# EAGLE board BlinkyTile_panel2 (EAGLE 7.1.0)
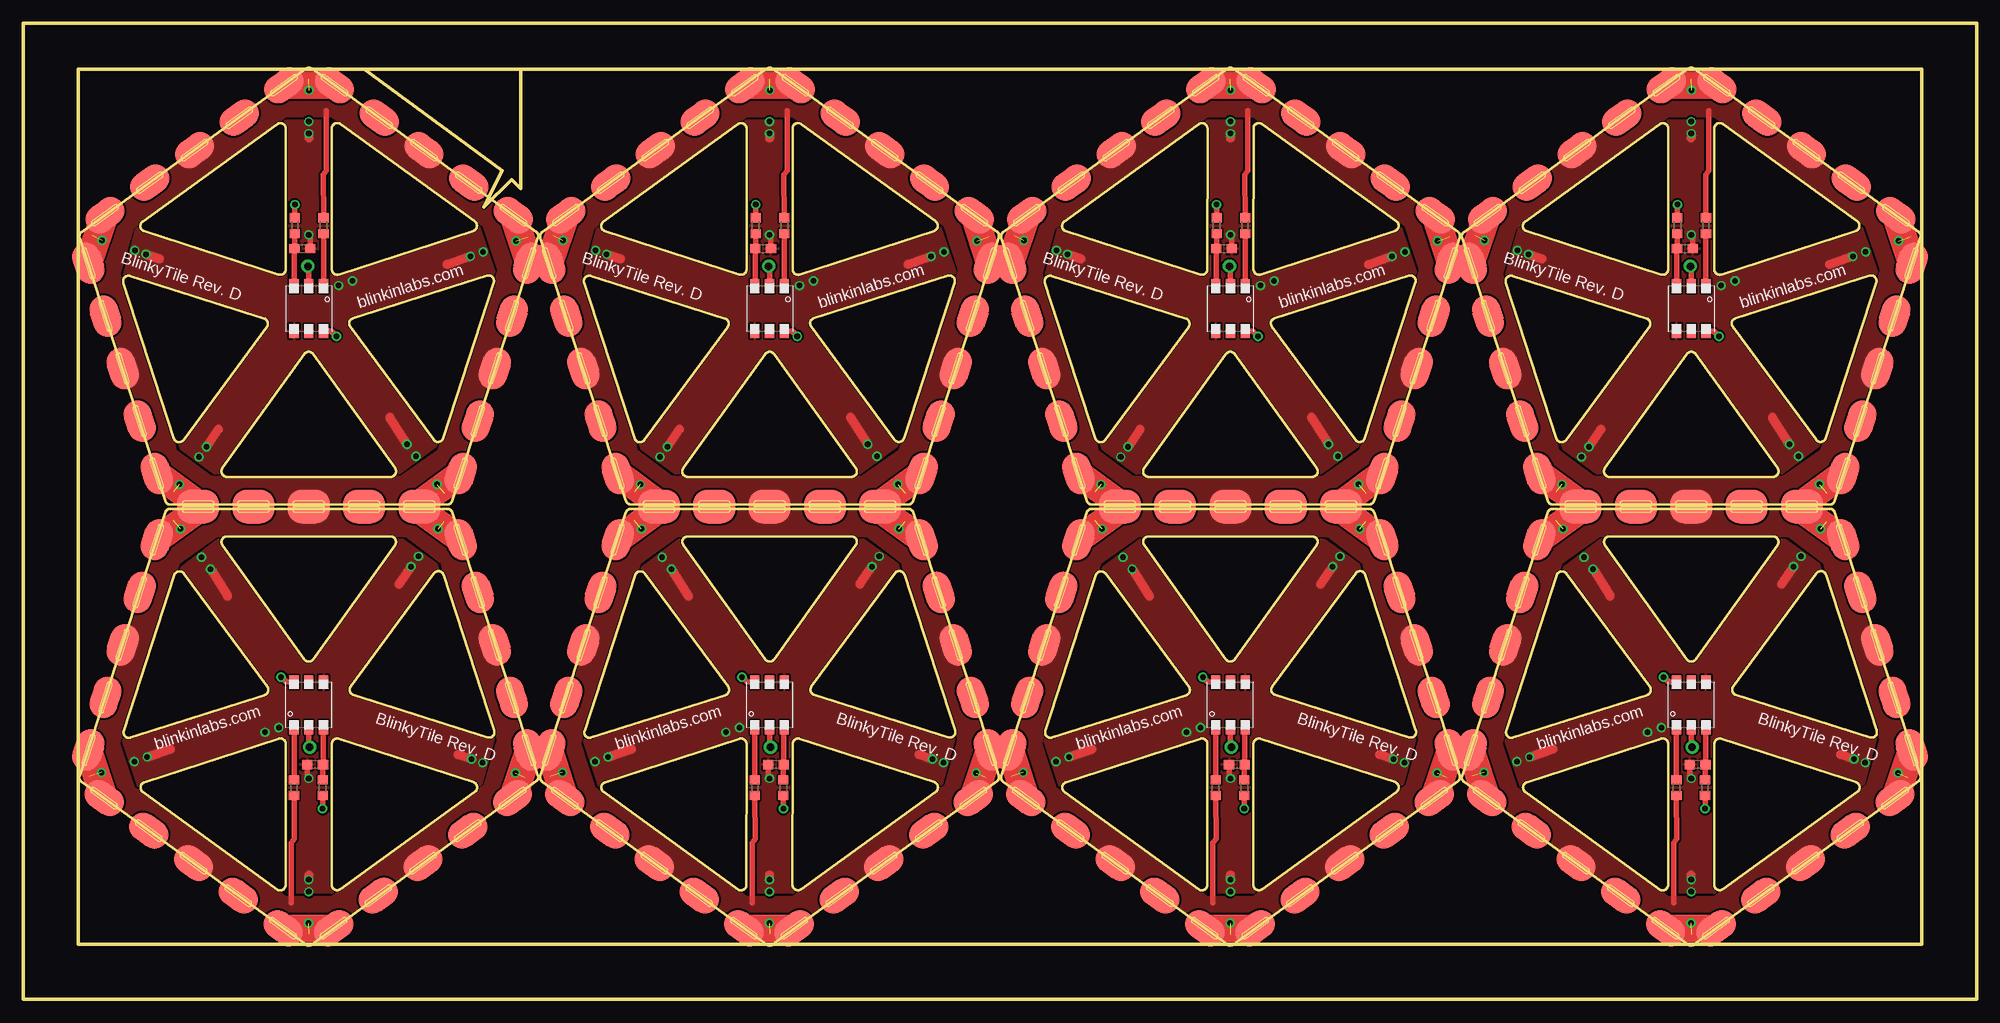
[diagram p0: board, top side]
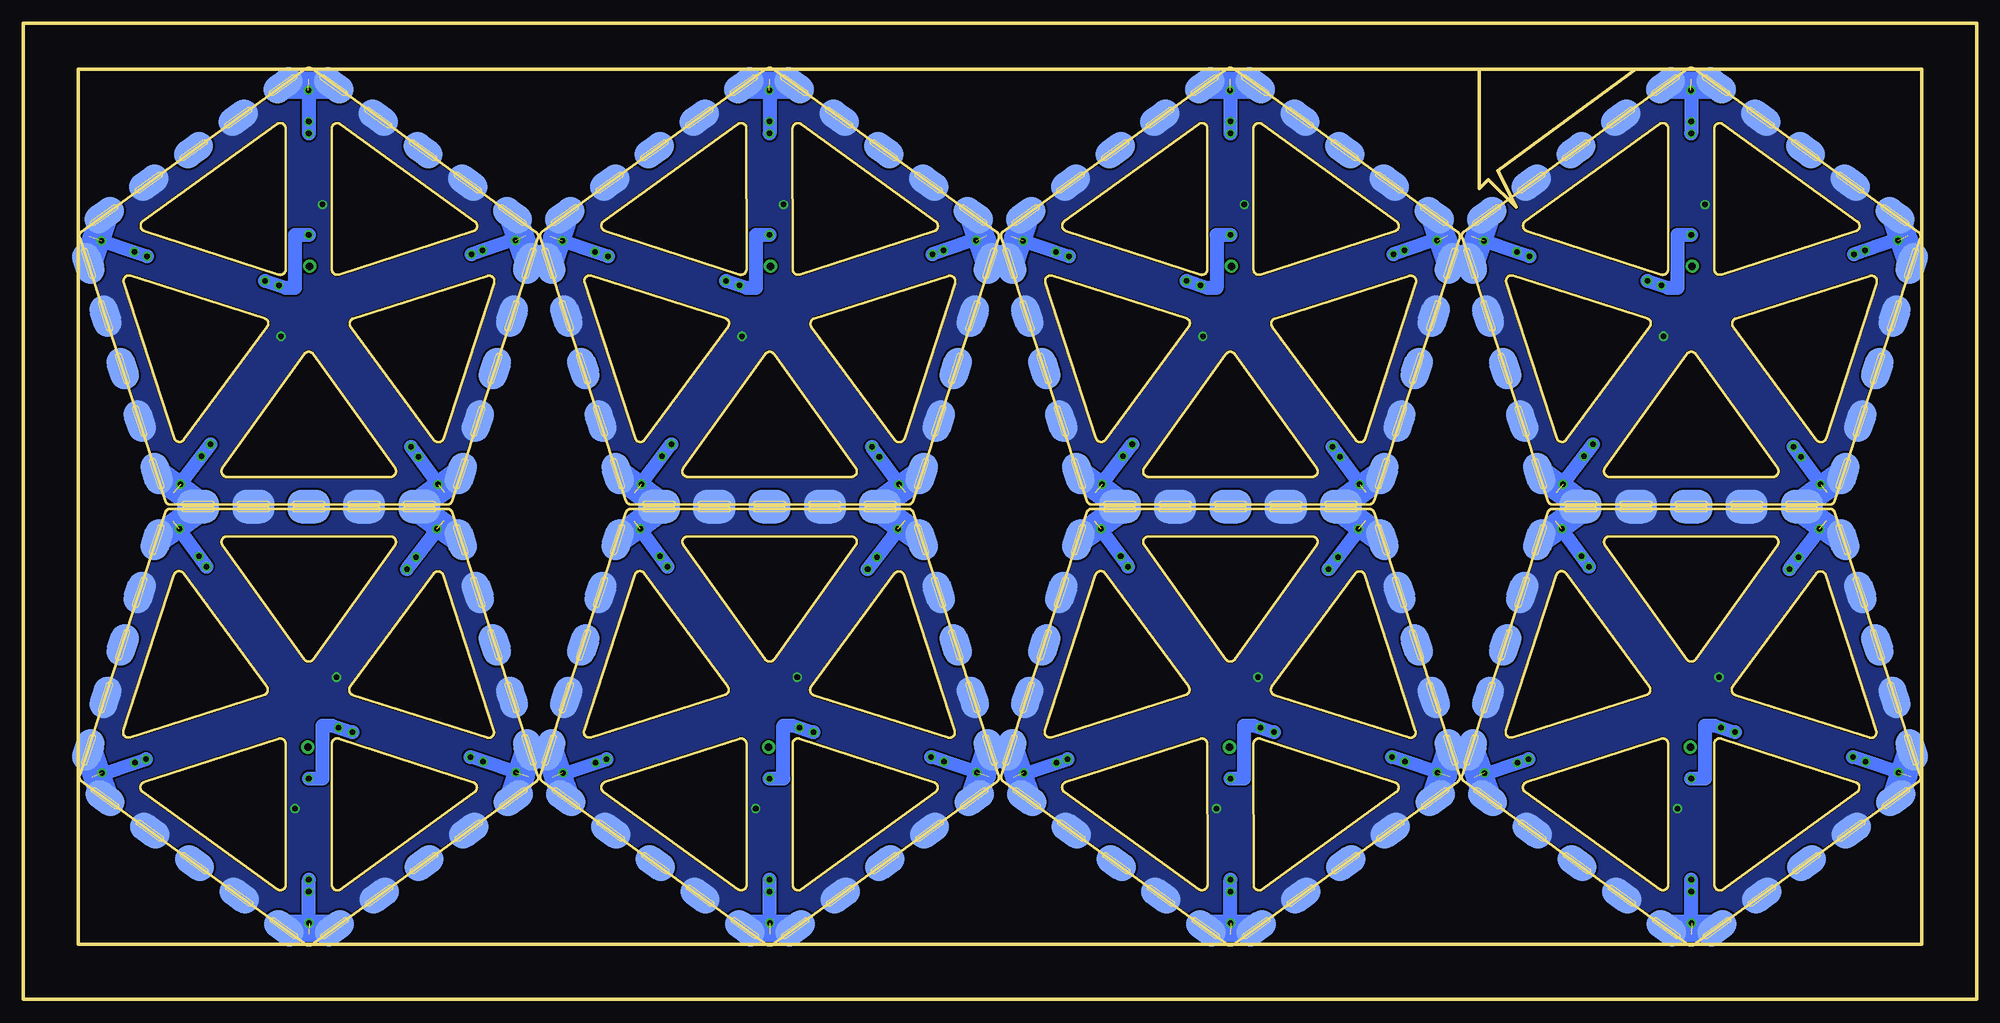
[diagram p1: board, bottom side, seen from below]

Size 212 x 106 mm. Coordinates in mm from the lower left corner, seen from the top.
Outline: 37,101 6,101 6,6 206,6 206,101 54,101
Outline: 37,101 54,101
Outline: 54,101 54,88 53,89 50,86 52,90 37,101
Outline: 6.14,82.66 15.41,54.14 arc72 15.99,53.73 46.01,53.73 arc72 46.59,54.14 55.86,82.7 arc72 55.65,83.38 31.35,101.02 arc72 30.65,101.02 6.35,83.33 arc72 6.14,82.66
Outline: 21.64,57.68 30.51,70.07 arc-109 31.49,70.07 40.36,57.68 arc-126 39.87,56.73 22.13,56.73 arc-126 21.64,57.68
Outline: 44.54,60.77 35.5,73.03 arc-109 35.8,73.96 50.33,78.57 arc-126 51.08,77.81 45.6,60.94 arc-126 44.54,60.77
Outline: 11.63,78.54 26.15,73.94 arc-109 26.45,73.01 17.41,60.74 arc-126 16.36,60.91 10.88,77.79 arc-126 11.63,78.54
Outline: 28.52,94.54 28.5,79.27 arc-108 27.71,78.69 13.14,83.4 arc-126 12.97,84.46 27.57,95.03 arc-126 28.52,94.54
Outline: 48.84,83.42 34.28,78.69 arc-108 33.5,79.26 33.51,94.55 arc-126 34.46,95.04 49.01,84.48 arc-126 48.84,83.42
Outline: 55.86,24.34 46.59,52.86 arc72 46.01,53.27 15.99,53.27 arc72 15.41,52.86 6.14,24.3 arc72 6.35,23.62 30.65,5.98 arc72 31.35,5.98 55.65,23.67 arc72 55.86,24.34
Outline: 40.36,49.32 31.49,36.93 arc-109 30.51,36.93 21.64,49.32 arc-126 22.13,50.27 39.87,50.27 arc-126 40.36,49.32
Outline: 17.46,46.23 26.5,33.97 arc-109 26.2,33.04 11.67,28.43 arc-126 10.92,29.19 16.4,46.06 arc-126 17.46,46.23
Outline: 50.37,28.46 35.85,33.06 arc-109 35.55,33.99 44.59,46.26 arc-126 45.64,46.09 51.12,29.21 arc-126 50.37,28.46
Outline: 33.48,12.46 33.5,27.73 arc-108 34.28,28.3 48.86,23.6 arc-126 49.03,22.54 34.43,11.97 arc-126 33.48,12.46
Outline: 13.16,23.58 27.72,28.31 arc-108 28.5,27.74 28.49,12.45 arc-126 27.54,11.96 12.99,22.52 arc-126 13.16,23.58
Outline: 0,106 212,106 212,0 0,0 0,106
Outline: 56.14,82.66 65.41,54.14 arc72 65.99,53.73 96.01,53.73 arc72 96.58,54.14 105.86,82.7 arc72 105.65,83.38 81.35,101.02 arc72 80.65,101.02 56.35,83.33 arc72 56.14,82.66
Outline: 71.64,57.68 80.51,70.07 arc-109 81.49,70.07 90.36,57.68 arc-126 89.87,56.73 72.13,56.73 arc-126 71.64,57.68
Outline: 94.54,60.77 85.5,73.03 arc-109 85.8,73.96 100.33,78.57 arc-126 101.08,77.81 95.6,60.94 arc-126 94.54,60.77
Outline: 61.63,78.54 76.15,73.94 arc-109 76.45,73.01 67.41,60.74 arc-126 66.36,60.91 60.88,77.79 arc-126 61.63,78.54
Outline: 78.52,94.54 78.5,79.27 arc-108 77.72,78.69 63.14,83.4 arc-126 62.97,84.46 77.57,95.03 arc-126 78.52,94.54
Outline: 98.84,83.42 84.28,78.69 arc-108 83.5,79.26 83.51,94.55 arc-126 84.46,95.04 99.01,84.48 arc-126 98.84,83.42
Outline: 105.86,24.34 96.58,52.86 arc72 96.01,53.27 65.99,53.27 arc72 65.41,52.86 56.14,24.3 arc72 56.35,23.62 80.65,5.98 arc72 81.35,5.98 105.65,23.67 arc72 105.86,24.34
Outline: 90.36,49.32 81.49,36.93 arc-109 80.51,36.93 71.64,49.32 arc-126 72.13,50.27 89.87,50.27 arc-126 90.36,49.32
Outline: 67.46,46.23 76.5,33.97 arc-109 76.2,33.04 61.67,28.43 arc-126 60.92,29.19 66.4,46.06 arc-126 67.46,46.23
Outline: 100.37,28.46 85.85,33.06 arc-109 85.55,33.99 94.59,46.26 arc-126 95.64,46.09 101.12,29.21 arc-126 100.37,28.46
Outline: 83.48,12.46 83.5,27.73 arc-108 84.28,28.3 98.86,23.6 arc-126 99.03,22.54 84.43,11.97 arc-126 83.48,12.46
Outline: 63.16,23.58 77.72,28.31 arc-108 78.5,27.74 78.49,12.45 arc-126 77.54,11.96 62.99,22.52 arc-126 63.16,23.58
Outline: 106.14,82.66 115.42,54.14 arc72 115.99,53.73 146.01,53.73 arc72 146.58,54.14 155.87,82.7 arc72 155.65,83.38 131.35,101.02 arc72 130.65,101.02 106.35,83.33 arc72 106.14,82.66
Outline: 121.64,57.68 130.51,70.07 arc-109 131.49,70.07 140.36,57.68 arc-126 139.87,56.73 122.13,56.73 arc-126 121.64,57.68
Outline: 144.54,60.77 135.5,73.03 arc-109 135.8,73.96 150.33,78.57 arc-126 151.08,77.81 145.6,60.94 arc-126 144.54,60.77
Outline: 111.63,78.54 126.15,73.94 arc-109 126.45,73.01 117.41,60.74 arc-126 116.36,60.91 110.88,77.79 arc-126 111.63,78.54
Outline: 128.52,94.54 128.5,79.27 arc-108 127.72,78.69 113.14,83.4 arc-126 112.97,84.46 127.57,95.03 arc-126 128.52,94.54
Outline: 148.84,83.42 134.28,78.69 arc-108 133.5,79.26 133.51,94.55 arc-126 134.46,95.04 149.01,84.48 arc-126 148.84,83.42
Outline: 155.87,24.34 146.58,52.86 arc72 146.01,53.27 115.99,53.27 arc72 115.42,52.86 106.14,24.3 arc72 106.35,23.62 130.65,5.98 arc72 131.35,5.98 155.65,23.67 arc72 155.87,24.34
Outline: 140.36,49.32 131.49,36.93 arc-109 130.51,36.93 121.64,49.32 arc-126 122.13,50.27 139.87,50.27 arc-126 140.36,49.32
Outline: 117.46,46.23 126.5,33.97 arc-109 126.2,33.04 111.67,28.43 arc-126 110.92,29.19 116.4,46.06 arc-126 117.46,46.23
Outline: 150.37,28.46 135.85,33.06 arc-109 135.55,33.99 144.59,46.26 arc-126 145.64,46.09 151.12,29.21 arc-126 150.37,28.46
Outline: 133.48,12.46 133.5,27.73 arc-108 134.28,28.3 148.86,23.6 arc-126 149.03,22.54 134.43,11.97 arc-126 133.48,12.46
Outline: 113.16,23.58 127.72,28.31 arc-108 128.5,27.74 128.49,12.45 arc-126 127.54,11.96 112.99,22.52 arc-126 113.16,23.58
Outline: 156.13,82.66 165.41,54.14 arc72 165.99,53.73 196.01,53.73 arc72 196.59,54.14 205.87,82.7 arc72 205.65,83.38 181.35,101.02 arc72 180.65,101.02 156.35,83.33 arc72 156.13,82.66
Outline: 171.64,57.68 180.51,70.07 arc-109 181.49,70.07 190.36,57.68 arc-126 189.87,56.73 172.13,56.73 arc-126 171.64,57.68
Outline: 194.54,60.77 185.5,73.03 arc-109 185.8,73.96 200.33,78.57 arc-126 201.08,77.81 195.6,60.94 arc-126 194.54,60.77
Outline: 161.63,78.54 176.15,73.94 arc-109 176.46,73.01 167.41,60.74 arc-126 166.36,60.91 160.88,77.79 arc-126 161.63,78.54
Outline: 178.52,94.54 178.5,79.27 arc-108 177.72,78.69 163.14,83.4 arc-126 162.97,84.46 177.57,95.03 arc-126 178.52,94.54
Outline: 198.84,83.42 184.28,78.69 arc-108 183.5,79.26 183.51,94.55 arc-126 184.46,95.04 199.01,84.48 arc-126 198.84,83.42
Outline: 205.87,24.34 196.59,52.86 arc72 196.01,53.27 165.99,53.27 arc72 165.41,52.86 156.13,24.3 arc72 156.35,23.62 180.65,5.98 arc72 181.35,5.98 205.65,23.67 arc72 205.87,24.34
Outline: 190.36,49.32 181.49,36.93 arc-109 180.51,36.93 171.64,49.32 arc-126 172.13,50.27 189.87,50.27 arc-126 190.36,49.32
Outline: 167.46,46.23 176.5,33.97 arc-109 176.2,33.04 161.67,28.43 arc-126 160.92,29.19 166.4,46.06 arc-126 167.46,46.23
Outline: 200.37,28.46 185.85,33.06 arc-109 185.54,33.99 194.59,46.26 arc-126 195.64,46.09 201.12,29.21 arc-126 200.37,28.46
Outline: 183.48,12.46 183.5,27.73 arc-108 184.28,28.3 198.86,23.6 arc-126 199.03,22.54 184.43,11.97 arc-126 183.48,12.46
Outline: 163.16,23.58 177.72,28.31 arc-108 178.5,27.74 178.49,12.45 arc-126 177.54,11.96 162.99,22.52 arc-126 163.16,23.58
Copper layers (1*16): Top 0.035mm / dielectric 1.5mm / Bottom 0.035mm
Design rules "default *": minimum track width 10mil, minimum drill 0.6mm, track to track 8mil, track to pad 8mil, pad to pad 8mil, via to via 8mil, smd to smd 8mil, copper to edge 0.1mm, drill to drill 8mil, minimum pad ring 10mil, minimum via ring 8mil, stop-mask expansion 4mil, vias tented up to drill 0.6mm, thermal gap 10mil
tRestrict: area 29,78 to 33,81

## Footprints (pad centres in the part's own frame; a part is rotated, then mirrored left to right if it is on the bottom)
C0603 = smd 1.1 x 1: 1 -0.85,0; 2 0.85,0
R0603 = smd 1 x 1.1: 1 -0.85,0; 2 0.85,0
D_EDGE_SLOT = smd 4.572 x 3.048: P$1 -12,0; P$2 -6,0; P$3 0,0; P$4 6,0; P$5 12,0 | smd 4.572 x 3.048 bottom: P$6 -12,0; P$7 -6,0; P$8 0,0; P$9 6,0; P$10 12,0
WS2822S_LED = smd 1.5 x 1: 1 -2.45,1.6; 2 -2.45,0; 3 -2.45,-1.6; 4 2.45,-1.6; 5 2.45,0; 6 2.45,1.6

## Placement (x,y rotation side)
C1  .1uF  [C0603]  30.3,81.5 0 top
C2  .1uF  [C0603]  31.7,25.5 180 top
C3  .1uF  [C0603]  80.3,81.5 0 top
C4  .1uF  [C0603]  81.7,25.5 180 top
C5  .1uF  [C0603]  130.3,81.5 0 top
C6  .1uF  [C0603]  131.7,25.5 180 top
C7  .1uF  [C0603]  180.3,81.5 0 top
C8  .1uF  [C0603]  181.7,25.5 180 top
R1  75  [R0603]  29.5,84 270 top
R2  10k  [R0603]  32.6,84 90 top
R3  75  [R0603]  32.5,23 90 top
R4  10k  [R0603]  29.4,23 270 top
R5  75  [R0603]  79.5,84 270 top
R6  10k  [R0603]  82.6,84 90 top
R7  75  [R0603]  82.5,23 90 top
R8  10k  [R0603]  79.4,23 270 top
R9  75  [R0603]  129.5,84 270 top
R10  10k  [R0603]  132.6,84 90 top
R11  75  [R0603]  132.5,23 90 top
R12  10k  [R0603]  129.4,23 270 top
R13  75  [R0603]  179.5,84 270 top
R14  10k  [R0603]  182.6,84 90 top
R15  75  [R0603]  182.5,23 90 top
R16  10k  [R0603]  179.4,23 270 top
U$1  D_EDGESLOT  [D_EDGE_SLOT]  31,53.2 180 top
U$2  D_EDGESLOT  [D_EDGE_SLOT]  31,53.8 0 top
U$3  D_EDGESLOT  [D_EDGE_SLOT]  51.2,68.5 72 top
U$4  D_EDGESLOT  [D_EDGE_SLOT]  10.8,68.5 288 top
U$5  D_EDGESLOT  [D_EDGE_SLOT]  43.5,92.2 144 top
U$6  D_EDGESLOT  [D_EDGE_SLOT]  18.6,92.2 216 top
U$7  WS2822S_LED  [WS2822S_LED]  31,75 270 top
U$8  D_EDGESLOT  [D_EDGE_SLOT]  10.8,38.5 252 top
U$9  D_EDGESLOT  [D_EDGE_SLOT]  51.2,38.5 108 top
U$10  D_EDGESLOT  [D_EDGE_SLOT]  18.5,14.8 324 top
U$11  D_EDGESLOT  [D_EDGE_SLOT]  43.4,14.8 36 top
U$12  WS2822S_LED  [WS2822S_LED]  31,32 90 top
U$13  D_EDGESLOT  [D_EDGE_SLOT]  81,53.8 0 top
U$14  D_EDGESLOT  [D_EDGE_SLOT]  101.2,68.5 72 top
U$15  D_EDGESLOT  [D_EDGE_SLOT]  60.8,68.5 288 top
U$16  D_EDGESLOT  [D_EDGE_SLOT]  93.5,92.2 144 top
U$17  D_EDGESLOT  [D_EDGE_SLOT]  68.6,92.2 216 top
U$18  WS2822S_LED  [WS2822S_LED]  81,75 270 top
U$19  D_EDGESLOT  [D_EDGE_SLOT]  81,53.2 180 top
U$20  D_EDGESLOT  [D_EDGE_SLOT]  60.8,38.5 252 top
U$21  D_EDGESLOT  [D_EDGE_SLOT]  101.2,38.5 108 top
U$22  D_EDGESLOT  [D_EDGE_SLOT]  68.5,14.8 324 top
U$23  D_EDGESLOT  [D_EDGE_SLOT]  93.4,14.8 36 top
U$24  WS2822S_LED  [WS2822S_LED]  81,32 90 top
U$25  D_EDGESLOT  [D_EDGE_SLOT]  131,53.8 0 top
U$26  D_EDGESLOT  [D_EDGE_SLOT]  151.2,68.5 72 top
U$27  D_EDGESLOT  [D_EDGE_SLOT]  110.8,68.5 288 top
U$28  D_EDGESLOT  [D_EDGE_SLOT]  143.5,92.2 144 top
U$29  D_EDGESLOT  [D_EDGE_SLOT]  118.6,92.2 216 top
U$30  WS2822S_LED  [WS2822S_LED]  131,75 270 top
U$31  D_EDGESLOT  [D_EDGE_SLOT]  131,53.2 180 top
U$32  D_EDGESLOT  [D_EDGE_SLOT]  110.8,38.5 252 top
U$33  D_EDGESLOT  [D_EDGE_SLOT]  151.2,38.5 108 top
U$34  D_EDGESLOT  [D_EDGE_SLOT]  118.5,14.8 324 top
U$35  D_EDGESLOT  [D_EDGE_SLOT]  143.4,14.8 36 top
U$36  WS2822S_LED  [WS2822S_LED]  131,32 90 top
U$37  D_EDGESLOT  [D_EDGE_SLOT]  181,53.8 0 top
U$38  D_EDGESLOT  [D_EDGE_SLOT]  201.2,68.5 72 top
U$39  D_EDGESLOT  [D_EDGE_SLOT]  160.8,68.5 288 top
U$40  D_EDGESLOT  [D_EDGE_SLOT]  193.5,92.2 144 top
U$41  D_EDGESLOT  [D_EDGE_SLOT]  168.6,92.2 216 top
U$42  WS2822S_LED  [WS2822S_LED]  181,75 270 top
U$43  D_EDGESLOT  [D_EDGE_SLOT]  181,53.2 180 top
U$44  D_EDGESLOT  [D_EDGE_SLOT]  160.8,38.5 252 top
U$45  D_EDGESLOT  [D_EDGE_SLOT]  201.2,38.5 108 top
U$46  D_EDGESLOT  [D_EDGE_SLOT]  168.5,14.8 324 top
U$47  D_EDGESLOT  [D_EDGE_SLOT]  193.4,14.8 36 top
U$48  WS2822S_LED  [WS2822S_LED]  181,32 90 top

## Library data of the parts
C1-C8 R1-R16 = adafruit
U$1-U$6 U$8-U$11 U$13-U$17 U$19-U$23 U$25-U$29 U$31-U$35 U$37-U$41 U$43-U$47 = dodocohedreled
U$7 U$12 U$18 U$24 U$30 U$36 U$42 U$48 = blinkinlabs

## Nets
5V: R1.1 U$2.P$2 U$2.P$4 U$2.P$7 U$2.P$9 U$3.P$2 U$3.P$4 U$3.P$7 U$3.P$9 U$4.P$2 U$4.P$4 U$4.P$7 U$4.P$9 U$5.P$2 U$5.P$4 U$5.P$7 U$5.P$9 U$6.P$2 U$6.P$4 U$6.P$7 U$6.P$9 U$7.6
5V1: R3.1 U$1.P$2 U$1.P$4 U$1.P$7 U$1.P$9 U$8.P$2 U$8.P$4 U$8.P$7 U$8.P$9 U$9.P$2 U$9.P$4 U$9.P$7 U$9.P$9 U$10.P$2 U$10.P$4 U$10.P$7 U$10.P$9 U$11.P$2 U$11.P$4 U$11.P$7 U$11.P$9 U$12.6
5V2: R5.1 U$13.P$2 U$13.P$4 U$13.P$7 U$13.P$9 U$14.P$2 U$14.P$4 U$14.P$7 U$14.P$9 U$15.P$2 U$15.P$4 U$15.P$7 U$15.P$9 U$16.P$2 U$16.P$4 U$16.P$7 U$16.P$9 U$17.P$2 U$17.P$4 U$17.P$7 U$17.P$9 U$18.6
5V3: R7.1 U$19.P$2 U$19.P$4 U$19.P$7 U$19.P$9 U$20.P$2 U$20.P$4 U$20.P$7 U$20.P$9 U$21.P$2 U$21.P$4 U$21.P$7 U$21.P$9 U$22.P$2 U$22.P$4 U$22.P$7 U$22.P$9 U$23.P$2 U$23.P$4 U$23.P$7 U$23.P$9 U$24.6
5V4: R9.1 U$25.P$2 U$25.P$4 U$25.P$7 U$25.P$9 U$26.P$2 U$26.P$4 U$26.P$7 U$26.P$9 U$27.P$2 U$27.P$4 U$27.P$7 U$27.P$9 U$28.P$2 U$28.P$4 U$28.P$7 U$28.P$9 U$29.P$2 U$29.P$4 U$29.P$7 U$29.P$9 U$30.6
5V5: R11.1 U$31.P$2 U$31.P$4 U$31.P$7 U$31.P$9 U$32.P$2 U$32.P$4 U$32.P$7 U$32.P$9 U$33.P$2 U$33.P$4 U$33.P$7 U$33.P$9 U$34.P$2 U$34.P$4 U$34.P$7 U$34.P$9 U$35.P$2 U$35.P$4 U$35.P$7 U$35.P$9 U$36.6
5V6: R13.1 U$37.P$2 U$37.P$4 U$37.P$7 U$37.P$9 U$38.P$2 U$38.P$4 U$38.P$7 U$38.P$9 U$39.P$2 U$39.P$4 U$39.P$7 U$39.P$9 U$40.P$2 U$40.P$4 U$40.P$7 U$40.P$9 U$41.P$2 U$41.P$4 U$41.P$7 U$41.P$9 U$42.6
5V7: R15.1 U$43.P$2 U$43.P$4 U$43.P$7 U$43.P$9 U$44.P$2 U$44.P$4 U$44.P$7 U$44.P$9 U$45.P$2 U$45.P$4 U$45.P$7 U$45.P$9 U$46.P$2 U$46.P$4 U$46.P$7 U$46.P$9 U$47.P$2 U$47.P$4 U$47.P$7 U$47.P$9 U$48.6
ADRI: U$7.2
ADRI1: U$12.2
ADRI2: U$18.2
ADRI3: U$24.2
ADRI4: U$30.2
ADRI5: U$36.2
ADRI6: U$42.2
ADRI7: U$48.2
DATA: R2.2 U$2.P$3 U$2.P$8 U$3.P$3 U$3.P$8 U$4.P$3 U$4.P$8 U$5.P$3 U$5.P$8 U$6.P$3 U$6.P$8
DATA1: R4.2 U$1.P$3 U$1.P$8 U$8.P$3 U$8.P$8 U$9.P$3 U$9.P$8 U$10.P$3 U$10.P$8 U$11.P$3 U$11.P$8
DATA2: R6.2 U$13.P$3 U$13.P$8 U$14.P$3 U$14.P$8 U$15.P$3 U$15.P$8 U$16.P$3 U$16.P$8 U$17.P$3 U$17.P$8
DATA3: R8.2 U$19.P$3 U$19.P$8 U$20.P$3 U$20.P$8 U$21.P$3 U$21.P$8 U$22.P$3 U$22.P$8 U$23.P$3 U$23.P$8
DATA4: R10.2 U$25.P$3 U$25.P$8 U$26.P$3 U$26.P$8 U$27.P$3 U$27.P$8 U$28.P$3 U$28.P$8 U$29.P$3 U$29.P$8
DATA5: R12.2 U$31.P$3 U$31.P$8 U$32.P$3 U$32.P$8 U$33.P$3 U$33.P$8 U$34.P$3 U$34.P$8 U$35.P$3 U$35.P$8
DATA6: R14.2 U$37.P$3 U$37.P$8 U$38.P$3 U$38.P$8 U$39.P$3 U$39.P$8 U$40.P$3 U$40.P$8 U$41.P$3 U$41.P$8
DATA7: R16.2 U$43.P$3 U$43.P$8 U$44.P$3 U$44.P$8 U$45.P$3 U$45.P$8 U$46.P$3 U$46.P$8 U$47.P$3 U$47.P$8
GND: C1.2 U$2.P$1 U$2.P$5 U$2.P$6 U$2.P$10 U$3.P$1 U$3.P$5 U$3.P$6 U$3.P$10 U$4.P$1 U$4.P$5 U$4.P$6 U$4.P$10 U$5.P$1 U$5.P$5 U$5.P$6 U$5.P$10 U$6.P$1 U$6.P$5 U$6.P$6 U$6.P$10 U$7.4
GND1: C2.2 U$1.P$1 U$1.P$5 U$1.P$6 U$1.P$10 U$8.P$1 U$8.P$5 U$8.P$6 U$8.P$10 U$9.P$1 U$9.P$5 U$9.P$6 U$9.P$10 U$10.P$1 U$10.P$5 U$10.P$6 U$10.P$10 U$11.P$1 U$11.P$5 U$11.P$6 U$11.P$10 U$12.4
GND2: C3.2 U$13.P$1 U$13.P$5 U$13.P$6 U$13.P$10 U$14.P$1 U$14.P$5 U$14.P$6 U$14.P$10 U$15.P$1 U$15.P$5 U$15.P$6 U$15.P$10 U$16.P$1 U$16.P$5 U$16.P$6 U$16.P$10 U$17.P$1 U$17.P$5 U$17.P$6 U$17.P$10 U$18.4
GND3: C4.2 U$19.P$1 U$19.P$5 U$19.P$6 U$19.P$10 U$20.P$1 U$20.P$5 U$20.P$6 U$20.P$10 U$21.P$1 U$21.P$5 U$21.P$6 U$21.P$10 U$22.P$1 U$22.P$5 U$22.P$6 U$22.P$10 U$23.P$1 U$23.P$5 U$23.P$6 U$23.P$10 U$24.4
GND4: C5.2 U$25.P$1 U$25.P$5 U$25.P$6 U$25.P$10 U$26.P$1 U$26.P$5 U$26.P$6 U$26.P$10 U$27.P$1 U$27.P$5 U$27.P$6 U$27.P$10 U$28.P$1 U$28.P$5 U$28.P$6 U$28.P$10 U$29.P$1 U$29.P$5 U$29.P$6 U$29.P$10 U$30.4
GND5: C6.2 U$31.P$1 U$31.P$5 U$31.P$6 U$31.P$10 U$32.P$1 U$32.P$5 U$32.P$6 U$32.P$10 U$33.P$1 U$33.P$5 U$33.P$6 U$33.P$10 U$34.P$1 U$34.P$5 U$34.P$6 U$34.P$10 U$35.P$1 U$35.P$5 U$35.P$6 U$35.P$10 U$36.4
GND6: C7.2 U$37.P$1 U$37.P$5 U$37.P$6 U$37.P$10 U$38.P$1 U$38.P$5 U$38.P$6 U$38.P$10 U$39.P$1 U$39.P$5 U$39.P$6 U$39.P$10 U$40.P$1 U$40.P$5 U$40.P$6 U$40.P$10 U$41.P$1 U$41.P$5 U$41.P$6 U$41.P$10 U$42.4
GND7: C8.2 U$43.P$1 U$43.P$5 U$43.P$6 U$43.P$10 U$44.P$1 U$44.P$5 U$44.P$6 U$44.P$10 U$45.P$1 U$45.P$5 U$45.P$6 U$45.P$10 U$46.P$1 U$46.P$5 U$46.P$6 U$46.P$10 U$47.P$1 U$47.P$5 U$47.P$6 U$47.P$10 U$48.4
N$1: C1.1 R1.2 U$7.3
N$2: R2.1 U$7.1
N$5: C2.1 R3.2 U$12.3
N$6: R4.1 U$12.1
N$8: C3.1 R5.2 U$18.3
N$9: R6.1 U$18.1
N$11: C4.1 R7.2 U$24.3
N$12: R8.1 U$24.1
N$14: C5.1 R9.2 U$30.3
N$15: R10.1 U$30.1
N$17: C6.1 R11.2 U$36.3
N$18: R12.1 U$36.1
N$20: C7.1 R13.2 U$42.3
N$21: R14.1 U$42.1
N$23: C8.1 R15.2 U$48.3
N$24: R16.1 U$48.1

## Tracks (layer width: path | path; a pad name or v marks a point on that pad's centre or on a via)
5V  (via drill 0.6)  (10 unrouted)
  Top 0.61: U$7.6 33.45,72.55 v34,72 | R1.1 v29.5,86.29
  pour Bottom: 15.55,53.73 6,83.12 31,101.28 56,83.12 46.45,53.73
5V1  (via drill 0.6)  (10 unrouted)
  Top 0.61: U$12.6 28.55,34.45 v28,35 | R3.1 v32.5,20.71
  pour Bottom: 46.45,53.27 56,23.88 31,5.72 6,23.88 15.55,53.27
5V2  (via drill 0.6)  (10 unrouted)
  Top 0.61: U$18.6 83.45,72.55 v84,72 | R5.1 v79.5,86.29
  pour Bottom: 65.55,53.73 56,83.12 81,101.28 106,83.12 96.45,53.73
5V3  (via drill 0.6)  (10 unrouted)
  Top 0.61: U$24.6 78.55,34.45 v78,35 | R7.1 v82.5,20.71
  pour Bottom: 96.45,53.27 106,23.88 81,5.72 56,23.88 65.55,53.27
5V4  (via drill 0.6)  (10 unrouted)
  Top 0.61: U$30.6 133.45,72.55 v134,72 | R9.1 v129.5,86.29
  pour Bottom: 115.55,53.73 106,83.12 131,101.28 156,83.12 146.45,53.73
5V5  (via drill 0.6)  (10 unrouted)
  Top 0.61: U$36.6 128.55,34.45 v128,35 | R11.1 v132.5,20.71
  pour Bottom: 146.45,53.27 156,23.88 131,5.72 106,23.88 115.55,53.27
5V6  (via drill 0.6)  (10 unrouted)
  Top 0.61: U$42.6 183.45,72.55 v184,72 | R13.1 v179.5,86.29
  pour Bottom: 165.55,53.73 156,83.12 181,101.28 206,83.12 196.45,53.73
5V7  (via drill 0.6)  (10 unrouted)
  Top 0.61: U$48.6 178.55,34.45 v178,35 | R15.1 v182.5,20.71
  pour Bottom: 196.45,53.27 206,23.88 181,5.72 156,23.88 165.55,53.27
ADRI  (via drill 0.8 pad 1.42)
  Top 0.61: U$7.2 31,79.5 v30.9,79.6
ADRI1  (via drill 0.8 pad 1.42)
  Top 0.61: U$12.2 31,27.5 v31.1,27.4
ADRI2  (via drill 0.8 pad 1.42)
  Top 0.61: U$18.2 81,79.5 v80.9,79.6
ADRI3  (via drill 0.8 pad 1.42)
  Top 0.61: U$24.2 81,27.5 v81.1,27.4
ADRI4  (via drill 0.8 pad 1.42)
  Top 0.61: U$30.2 131,79.5 v130.9,79.6
ADRI5  (via drill 0.8 pad 1.42)
  Top 0.61: U$36.2 131,27.5 v131.1,27.4
ADRI6  (via drill 0.8 pad 1.42)
  Top 0.61: U$42.2 181,79.5 v180.9,79.6
ADRI7  (via drill 0.8 pad 1.42)
  Top 0.61: U$48.2 181,27.5 v181.1,27.4
DATA  (5 unrouted)
  Top 0.61: R2.2 32.55,89.55 32.9,90 32.9,96.5
  pour Top: 15.6,53.8 46.5,53.7 56,83.1 31,101.3 6,83 13.7,59.3 16.43,60.48 10.45,78.74 11.89,83.76 28.5,95.9 33.5,95.9 50,84 51.6,79.2 45.1,59.6 41,56.7 20.4,56.7 16.4,59.7 14,58.4
DATA1  (5 unrouted)
  Top 0.61: R4.2 29.45,17.45 29.1,17 29.1,10.5
  pour Top: 46.4,53.2 15.5,53.3 6,23.9 31,5.7 56,24 48.3,47.7 45.57,46.52 51.55,28.26 50.11,23.24 33.5,11.1 28.5,11.1 12,23 10.4,27.8 16.9,47.4 21,50.3 41.6,50.3 45.6,47.3 48,48.6
DATA2  (5 unrouted)
  Top 0.61: R6.2 82.55,89.55 82.9,90 82.9,96.5
  pour Top: 65.6,53.8 96.5,53.7 106,83.1 81,101.3 56,83 63.7,59.3 66.43,60.48 60.45,78.74 61.89,83.76 78.5,95.9 83.5,95.9 100,84 101.6,79.2 95.1,59.6 91,56.7 70.4,56.7 66.4,59.7 64,58.4
DATA3  (5 unrouted)
  Top 0.61: R8.2 79.45,17.45 79.1,17 79.1,10.5
  pour Top: 96.4,53.2 65.5,53.3 56,23.9 81,5.7 106,24 98.3,47.7 95.57,46.52 101.55,28.26 100.11,23.24 83.5,11.1 78.5,11.1 62,23 60.4,27.8 66.9,47.4 71,50.3 91.6,50.3 95.6,47.3 98,48.6
DATA4  (5 unrouted)
  Top 0.61: R10.2 132.55,89.55 132.9,90 132.9,96.5
  pour Top: 115.6,53.8 146.5,53.7 156,83.1 131,101.3 106,83 113.7,59.3 116.43,60.48 110.45,78.74 111.89,83.76 128.5,95.9 133.5,95.9 150,84 151.6,79.2 145.1,59.6 141,56.7 120.4,56.7 116.4,59.7 114,58.4
DATA5  (5 unrouted)
  Top 0.61: R12.2 129.45,17.45 129.1,17 129.1,10.5
  pour Top: 146.4,53.2 115.5,53.3 106,23.9 131,5.7 156,24 148.3,47.7 145.57,46.52 151.55,28.26 150.11,23.24 133.5,11.1 128.5,11.1 112,23 110.4,27.8 116.9,47.4 121,50.3 141.6,50.3 145.6,47.3 148,48.6
DATA6  (5 unrouted)
  Top 0.61: R14.2 182.55,89.55 182.9,90 182.9,96.5
  pour Top: 165.6,53.8 196.5,53.7 206,83.1 181,101.3 156,83 163.7,59.3 166.43,60.48 160.45,78.74 161.89,83.76 178.5,95.9 183.5,95.9 200,84 201.6,79.2 195.1,59.6 191,56.7 170.4,56.7 166.4,59.7 164,58.4
DATA7  (5 unrouted)
  Top 0.61: R16.2 179.45,17.45 179.1,17 179.1,10.5
  pour Top: 196.4,53.2 165.5,53.3 156,23.9 181,5.7 206,24 198.3,47.7 195.57,46.52 201.55,28.26 200.11,23.24 183.5,11.1 178.5,11.1 162,23 160.4,27.8 166.9,47.4 171,50.3 191.6,50.3 195.6,47.3 198,48.6
GND  (via drill 0.6)  (10 unrouted)
  Top 0.61: C1.2 31.15,82.85 v31,83
  Top 1: v31,94 31,93.5 | v48.53,80.67 46,79.8 | v41.65,60.28 39.8,63.2 | v19.9,60 21.2,61.9 | v13.33,80.91 14.8,80.4
  Top 3: U$6.P$6 U$5.P$10 | U$6.P$10 U$4.P$6 | U$4.P$10 U$2.P$6 | U$2.P$10 U$3.P$6 | U$5.P$6 U$3.P$10
  Bottom 1: U$6.P$6 31,99.9 | U$5.P$6 54.8,82.8 | U$2.P$10 45.7,55 | U$2.P$6 16.3,55.1 | U$6.P$10 7.5,82.9
  Bottom 1.5: 31,99.9 v31,94 | 54.8,82.8 v48.53,80.67 | 45.7,55 v41.65,60.28 | 16.3,55.1 v19.9,60 | 7.5,82.9 v13.33,80.91 | v31,83 32.5,83 32.5,77.25 33.5,77.25 v35.75,78
  Bottom 3: U$4.P$10 U$2.P$6 | U$2.P$10 U$3.P$6 | U$3.P$10 U$5.P$6 | U$5.P$10 U$6.P$6 | U$4.P$6 U$6.P$10
  other vias: 31,95.3 49.93,81.17 42.65,58.98 19.1,58.9 12.13,81.31 16.97,55.91 8.58,82.4 31.03,98.7 53.48,82.35 44.91,55.92 34.25,77.5
  pour Top: 17.15,59.73 10.9,78.49 12.3,83.61 28.5,95.4 33.5,95.38 49.5,83.8 51.12,79 44.8,60.1 40.85,57.13 20.8,57.1
GND1  (via drill 0.6)  (10 unrouted)
  Top 0.61: C2.2 30.85,24.15 v31,24
  Top 1: v31,13 31,13.5 | v13.47,26.33 16,27.2 | v20.35,46.72 22.2,43.8 | v42.1,47 40.8,45.1 | v48.67,26.09 47.2,26.6
  Top 3: U$11.P$6 U$10.P$10 | U$11.P$10 U$9.P$6 | U$9.P$10 U$1.P$6 | U$1.P$10 U$8.P$6 | U$10.P$6 U$8.P$10
  Bottom 1: U$11.P$6 31,7.1 | U$10.P$6 7.2,24.2 | U$1.P$10 16.3,52 | U$1.P$6 45.7,51.9 | U$11.P$10 54.5,24.1
  Bottom 1.5: 31,7.1 v31,13 | 7.2,24.2 v13.47,26.33 | 16.3,52 v20.35,46.72 | 45.7,51.9 v42.1,47 | 54.5,24.1 v48.67,26.09 | v31,24 29.5,24 29.5,29.75 28.5,29.75 v26.25,29
  Bottom 3: U$9.P$10 U$1.P$6 | U$1.P$10 U$8.P$6 | U$8.P$10 U$10.P$6 | U$10.P$10 U$11.P$6 | U$9.P$6 U$11.P$10
  other vias: 31,11.7 12.07,25.83 19.35,48.02 42.9,48.1 49.87,25.69 45.03,51.09 53.42,24.6 30.97,8.3 8.52,24.65 17.09,51.08 27.75,29.5
  pour Top: 44.85,47.27 51.1,28.51 49.7,23.39 33.5,11.6 28.5,11.62 12.5,23.2 10.88,28 17.2,46.9 21.15,49.87 41.2,49.9
GND2  (via drill 0.6)  (10 unrouted)
  Top 0.61: C3.2 81.15,82.85 v81,83
  Top 1: v81,94 81,93.5 | v98.53,80.67 96,79.8 | v91.65,60.28 89.8,63.2 | v69.9,60 71.2,61.9 | v63.33,80.91 64.8,80.4
  Top 3: U$17.P$6 U$16.P$10 | U$17.P$10 U$15.P$6 | U$15.P$10 U$13.P$6 | U$13.P$10 U$14.P$6 | U$16.P$6 U$14.P$10
  Bottom 1: U$17.P$6 81,99.9 | U$16.P$6 104.8,82.8 | U$13.P$10 95.7,55 | U$13.P$6 66.3,55.1 | U$17.P$10 57.5,82.9
  Bottom 1.5: 81,99.9 v81,94 | 104.8,82.8 v98.53,80.67 | 95.7,55 v91.65,60.28 | 66.3,55.1 v69.9,60 | 57.5,82.9 v63.33,80.91 | v81,83 82.5,83 82.5,77.25 83.5,77.25 v85.75,78
  Bottom 3: U$15.P$10 U$13.P$6 | U$13.P$10 U$14.P$6 | U$14.P$10 U$16.P$6 | U$16.P$10 U$17.P$6 | U$15.P$6 U$17.P$10
  other vias: 81,95.3 99.93,81.17 92.65,58.98 69.1,58.9 62.13,81.31 66.97,55.91 58.58,82.4 81.03,98.7 103.48,82.35 94.91,55.92 84.25,77.5
  pour Top: 67.15,59.73 60.9,78.49 62.3,83.61 78.5,95.4 83.5,95.38 99.5,83.8 101.12,79 94.8,60.1 90.85,57.13 70.8,57.1
GND3  (via drill 0.6)  (10 unrouted)
  Top 0.61: C4.2 80.85,24.15 v81,24
  Top 1: v81,13 81,13.5 | v63.47,26.33 66,27.2 | v70.35,46.72 72.2,43.8 | v92.1,47 90.8,45.1 | v98.67,26.09 97.2,26.6
  Top 3: U$23.P$6 U$22.P$10 | U$23.P$10 U$21.P$6 | U$21.P$10 U$19.P$6 | U$19.P$10 U$20.P$6 | U$22.P$6 U$20.P$10
  Bottom 1: U$23.P$6 81,7.1 | U$22.P$6 57.2,24.2 | U$19.P$10 66.3,52 | U$19.P$6 95.7,51.9 | U$23.P$10 104.5,24.1
  Bottom 1.5: 81,7.1 v81,13 | 57.2,24.2 v63.47,26.33 | 66.3,52 v70.35,46.72 | 95.7,51.9 v92.1,47 | 104.5,24.1 v98.67,26.09 | v81,24 79.5,24 79.5,29.75 78.5,29.75 v76.25,29
  Bottom 3: U$21.P$10 U$19.P$6 | U$19.P$10 U$20.P$6 | U$20.P$10 U$22.P$6 | U$22.P$10 U$23.P$6 | U$21.P$6 U$23.P$10
  other vias: 81,11.7 62.07,25.83 69.35,48.02 92.9,48.1 99.87,25.69 95.03,51.09 103.42,24.6 80.97,8.3 58.52,24.65 67.09,51.08 77.75,29.5
  pour Top: 94.85,47.27 101.1,28.51 99.7,23.39 83.5,11.6 78.5,11.62 62.5,23.2 60.88,28 67.2,46.9 71.15,49.87 91.2,49.9
GND4  (via drill 0.6)  (10 unrouted)
  Top 0.61: C5.2 131.15,82.85 v131,83
  Top 1: v131,94 131,93.5 | v148.53,80.67 146,79.8 | v141.65,60.28 139.8,63.2 | v119.9,60 121.2,61.9 | v113.33,80.91 114.8,80.4
  Top 3: U$29.P$6 U$28.P$10 | U$29.P$10 U$27.P$6 | U$27.P$10 U$25.P$6 | U$25.P$10 U$26.P$6 | U$28.P$6 U$26.P$10
  Bottom 1: U$29.P$6 131,99.9 | U$28.P$6 154.8,82.8 | U$25.P$10 145.7,55 | U$25.P$6 116.3,55.1 | U$29.P$10 107.5,82.9
  Bottom 1.5: 131,99.9 v131,94 | 154.8,82.8 v148.53,80.67 | 145.7,55 v141.65,60.28 | 116.3,55.1 v119.9,60 | 107.5,82.9 v113.33,80.91 | v131,83 132.5,83 132.5,77.25 133.5,77.25 v135.75,78
  Bottom 3: U$27.P$10 U$25.P$6 | U$25.P$10 U$26.P$6 | U$26.P$10 U$28.P$6 | U$28.P$10 U$29.P$6 | U$27.P$6 U$29.P$10
  other vias: 131,95.3 149.93,81.17 142.65,58.98 119.1,58.9 112.13,81.31 116.97,55.91 108.58,82.4 131.03,98.7 153.48,82.35 144.91,55.92 134.25,77.5
  pour Top: 117.15,59.73 110.9,78.49 112.3,83.61 128.5,95.4 133.5,95.38 149.5,83.8 151.12,79 144.8,60.1 140.85,57.13 120.8,57.1
GND5  (via drill 0.6)  (10 unrouted)
  Top 0.61: C6.2 130.85,24.15 v131,24
  Top 1: v131,13 131,13.5 | v113.47,26.33 116,27.2 | v120.35,46.72 122.2,43.8 | v142.1,47 140.8,45.1 | v148.67,26.09 147.2,26.6
  Top 3: U$35.P$6 U$34.P$10 | U$35.P$10 U$33.P$6 | U$33.P$10 U$31.P$6 | U$31.P$10 U$32.P$6 | U$34.P$6 U$32.P$10
  Bottom 1: U$35.P$6 131,7.1 | U$34.P$6 107.2,24.2 | U$31.P$10 116.3,52 | U$31.P$6 145.7,51.9 | U$35.P$10 154.5,24.1
  Bottom 1.5: 131,7.1 v131,13 | 107.2,24.2 v113.47,26.33 | 116.3,52 v120.35,46.72 | 145.7,51.9 v142.1,47 | 154.5,24.1 v148.67,26.09 | v131,24 129.5,24 129.5,29.75 128.5,29.75 v126.25,29
  Bottom 3: U$33.P$10 U$31.P$6 | U$31.P$10 U$32.P$6 | U$32.P$10 U$34.P$6 | U$34.P$10 U$35.P$6 | U$33.P$6 U$35.P$10
  other vias: 131,11.7 112.07,25.83 119.35,48.02 142.9,48.1 149.87,25.69 145.03,51.09 153.42,24.6 130.97,8.3 108.52,24.65 117.09,51.08 127.75,29.5
  pour Top: 144.85,47.27 151.1,28.51 149.7,23.39 133.5,11.6 128.5,11.62 112.5,23.2 110.88,28 117.2,46.9 121.15,49.87 141.2,49.9
GND6  (via drill 0.6)  (10 unrouted)
  Top 0.61: C7.2 181.15,82.85 v181,83
  Top 1: v181,94 181,93.5 | v198.53,80.67 196,79.8 | v191.65,60.28 189.8,63.2 | v169.9,60 171.2,61.9 | v163.33,80.91 164.8,80.4
  Top 3: U$41.P$6 U$40.P$10 | U$41.P$10 U$39.P$6 | U$39.P$10 U$37.P$6 | U$37.P$10 U$38.P$6 | U$40.P$6 U$38.P$10
  Bottom 1: U$41.P$6 181,99.9 | U$40.P$6 204.8,82.8 | U$37.P$10 195.7,55 | U$37.P$6 166.3,55.1 | U$41.P$10 157.5,82.9
  Bottom 1.5: 181,99.9 v181,94 | 204.8,82.8 v198.53,80.67 | 195.7,55 v191.65,60.28 | 166.3,55.1 v169.9,60 | 157.5,82.9 v163.33,80.91 | v181,83 182.5,83 182.5,77.25 183.5,77.25 v185.75,78
  Bottom 3: U$39.P$10 U$37.P$6 | U$37.P$10 U$38.P$6 | U$38.P$10 U$40.P$6 | U$40.P$10 U$41.P$6 | U$39.P$6 U$41.P$10
  other vias: 181,95.3 199.93,81.17 192.65,58.98 169.1,58.9 162.13,81.31 166.97,55.91 158.58,82.4 181.03,98.7 203.48,82.35 194.91,55.92 184.25,77.5
  pour Top: 167.15,59.73 160.9,78.49 162.3,83.61 178.5,95.4 183.5,95.38 199.5,83.8 201.12,79 194.8,60.1 190.85,57.13 170.8,57.1
GND7  (via drill 0.6)  (10 unrouted)
  Top 0.61: C8.2 180.85,24.15 v181,24
  Top 1: v181,13 181,13.5 | v163.47,26.33 166,27.2 | v170.35,46.72 172.2,43.8 | v192.1,47 190.8,45.1 | v198.67,26.09 197.2,26.6
  Top 3: U$47.P$6 U$46.P$10 | U$47.P$10 U$45.P$6 | U$45.P$10 U$43.P$6 | U$43.P$10 U$44.P$6 | U$46.P$6 U$44.P$10
  Bottom 1: U$47.P$6 181,7.1 | U$46.P$6 157.2,24.2 | U$43.P$10 166.3,52 | U$43.P$6 195.7,51.9 | U$47.P$10 204.5,24.1
  Bottom 1.5: 181,7.1 v181,13 | 157.2,24.2 v163.47,26.33 | 166.3,52 v170.35,46.72 | 195.7,51.9 v192.1,47 | 204.5,24.1 v198.67,26.09 | v181,24 179.5,24 179.5,29.75 178.5,29.75 v176.25,29
  Bottom 3: U$45.P$10 U$43.P$6 | U$43.P$10 U$44.P$6 | U$44.P$10 U$46.P$6 | U$46.P$10 U$47.P$6 | U$45.P$6 U$47.P$10
  other vias: 181,11.7 162.07,25.83 169.35,48.02 192.9,48.1 199.87,25.69 195.03,51.09 203.42,24.6 180.97,8.3 158.52,24.65 167.09,51.08 177.75,29.5
  pour Top: 194.85,47.27 201.1,28.51 199.7,23.39 183.5,11.6 178.5,11.62 162.5,23.2 160.88,28 167.2,46.9 171.15,49.87 191.2,49.9
N$1
  Top 0.61: U$7.3 29.45,77.5 C1.1 29.5,81.55 R1.2
N$2
  Top 0.61: R2.1 U$7.1
N$3
  pour Top: 48,46 45.85,45.29 45.35,47.79 47.5,49.5
N$4
  pour Top: 14,61 16.15,61.71 16.65,59.21 14.5,57.5
N$5
  Top 0.61: U$12.3 32.55,29.5 C2.1 32.5,25.45 R3.2
N$6
  Top 0.61: R4.1 U$12.1
N$7
  pour Top: 64,61 66.15,61.71 66.65,59.21 64.5,57.5
N$8
  Top 0.61: U$18.3 79.45,77.5 C3.1 79.5,81.55 R5.2
N$9
  Top 0.61: R6.1 U$18.1
N$10
  pour Top: 98,46 95.85,45.29 95.35,47.79 97.5,49.5
N$11
  Top 0.61: U$24.3 82.55,29.5 C4.1 82.5,25.45 R7.2
N$12
  Top 0.61: R8.1 U$24.1
N$13
  pour Top: 114,61 116.15,61.71 116.65,59.21 114.5,57.5
N$14
  Top 0.61: U$30.3 129.45,77.5 C5.1 129.5,81.55 R9.2
N$15
  Top 0.61: R10.1 U$30.1
N$16
  pour Top: 148,46 145.85,45.29 145.35,47.79 147.5,49.5
N$17
  Top 0.61: U$36.3 132.55,29.5 C6.1 132.5,25.45 R11.2
N$18
  Top 0.61: R12.1 U$36.1
N$19
  pour Top: 164,61 166.15,61.71 166.65,59.21 164.5,57.5
N$20
  Top 0.61: U$42.3 179.45,77.5 C7.1 179.5,81.55 R13.2
N$21
  Top 0.61: R14.1 U$42.1
N$22
  pour Top: 198,46 195.85,45.29 195.35,47.79 197.5,49.5
N$23
  Top 0.61: U$48.3 182.55,29.5 C8.1 182.5,25.45 R15.2
N$24
  Top 0.61: R16.1 U$48.1

## Text on the board
tNames: BlinkyTile Rev. D | BlinkyTile Rev. D | BlinkyTile Rev. D | BlinkyTile Rev. D | blinkinlabs.com | blinkinlabs.com | blinkinlabs.com | blinkinlabs.com | blinkinlabs.com | blinkinlabs.com | blinkinlabs.com | blinkinlabs.com | BlinkyTile Rev. D | BlinkyTile Rev. D | BlinkyTile Rev. D | BlinkyTile Rev. D